# Allegro board democ2.brd
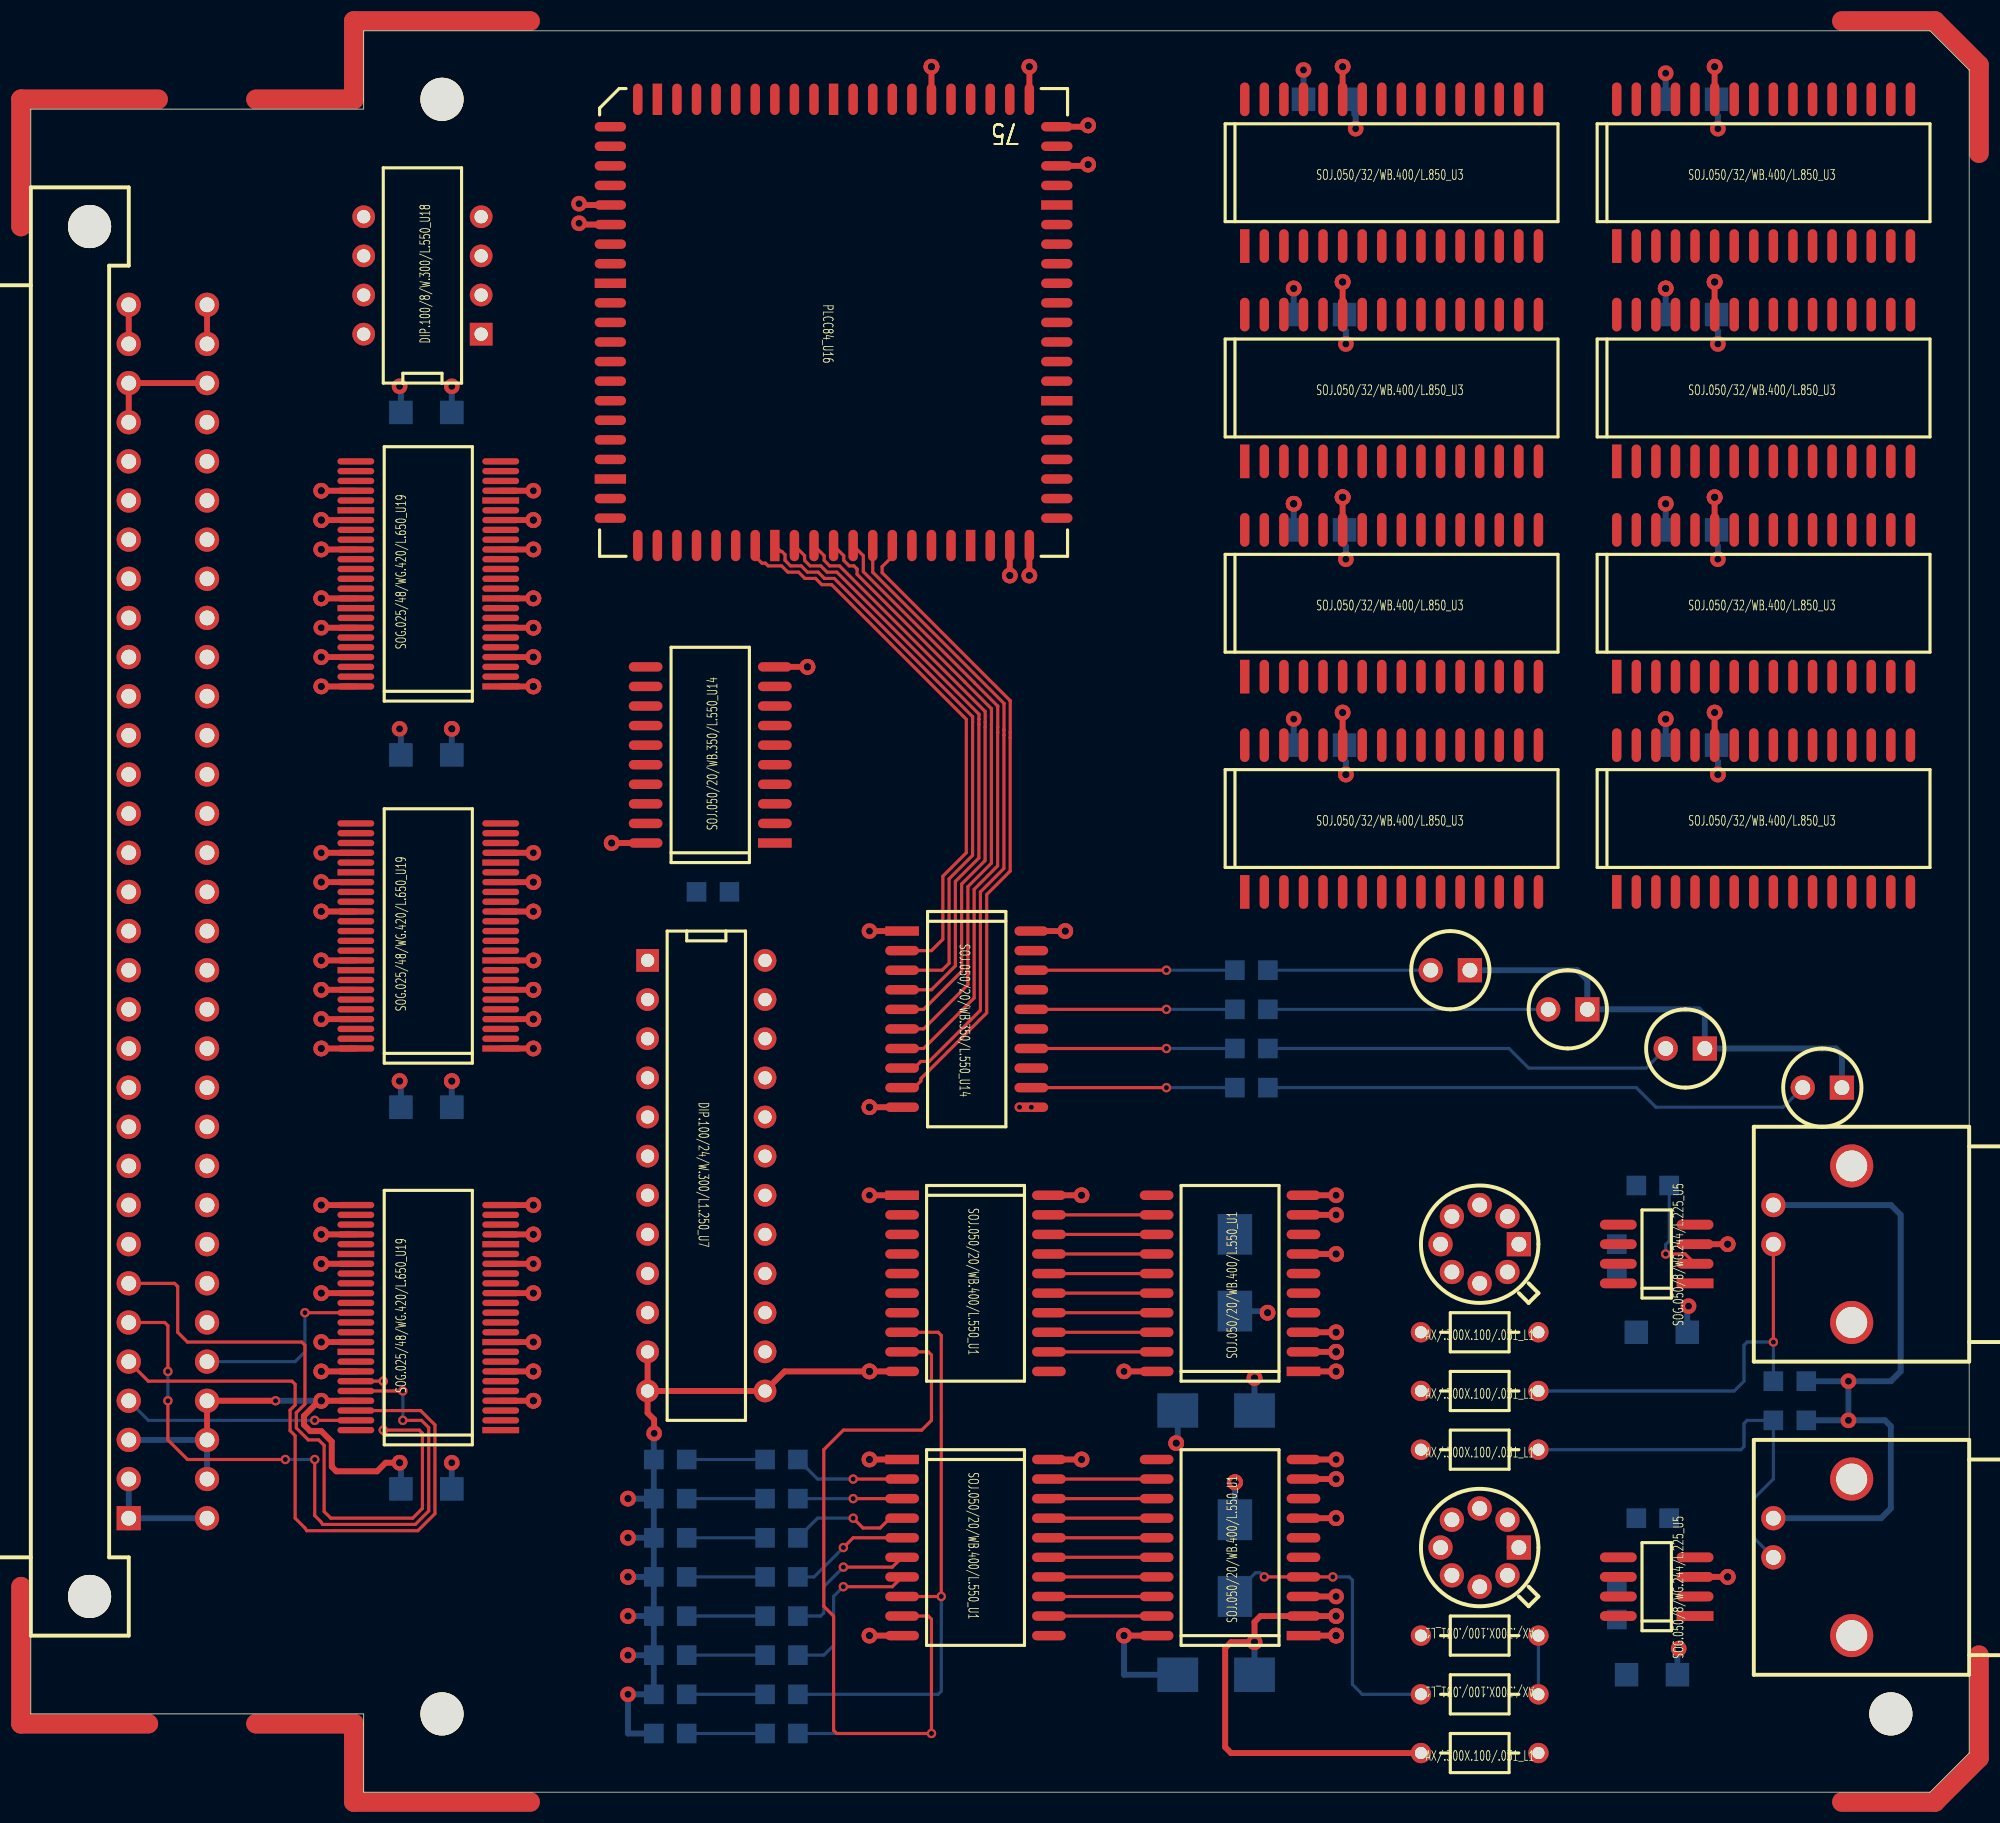
[diagram p0: board, top side]
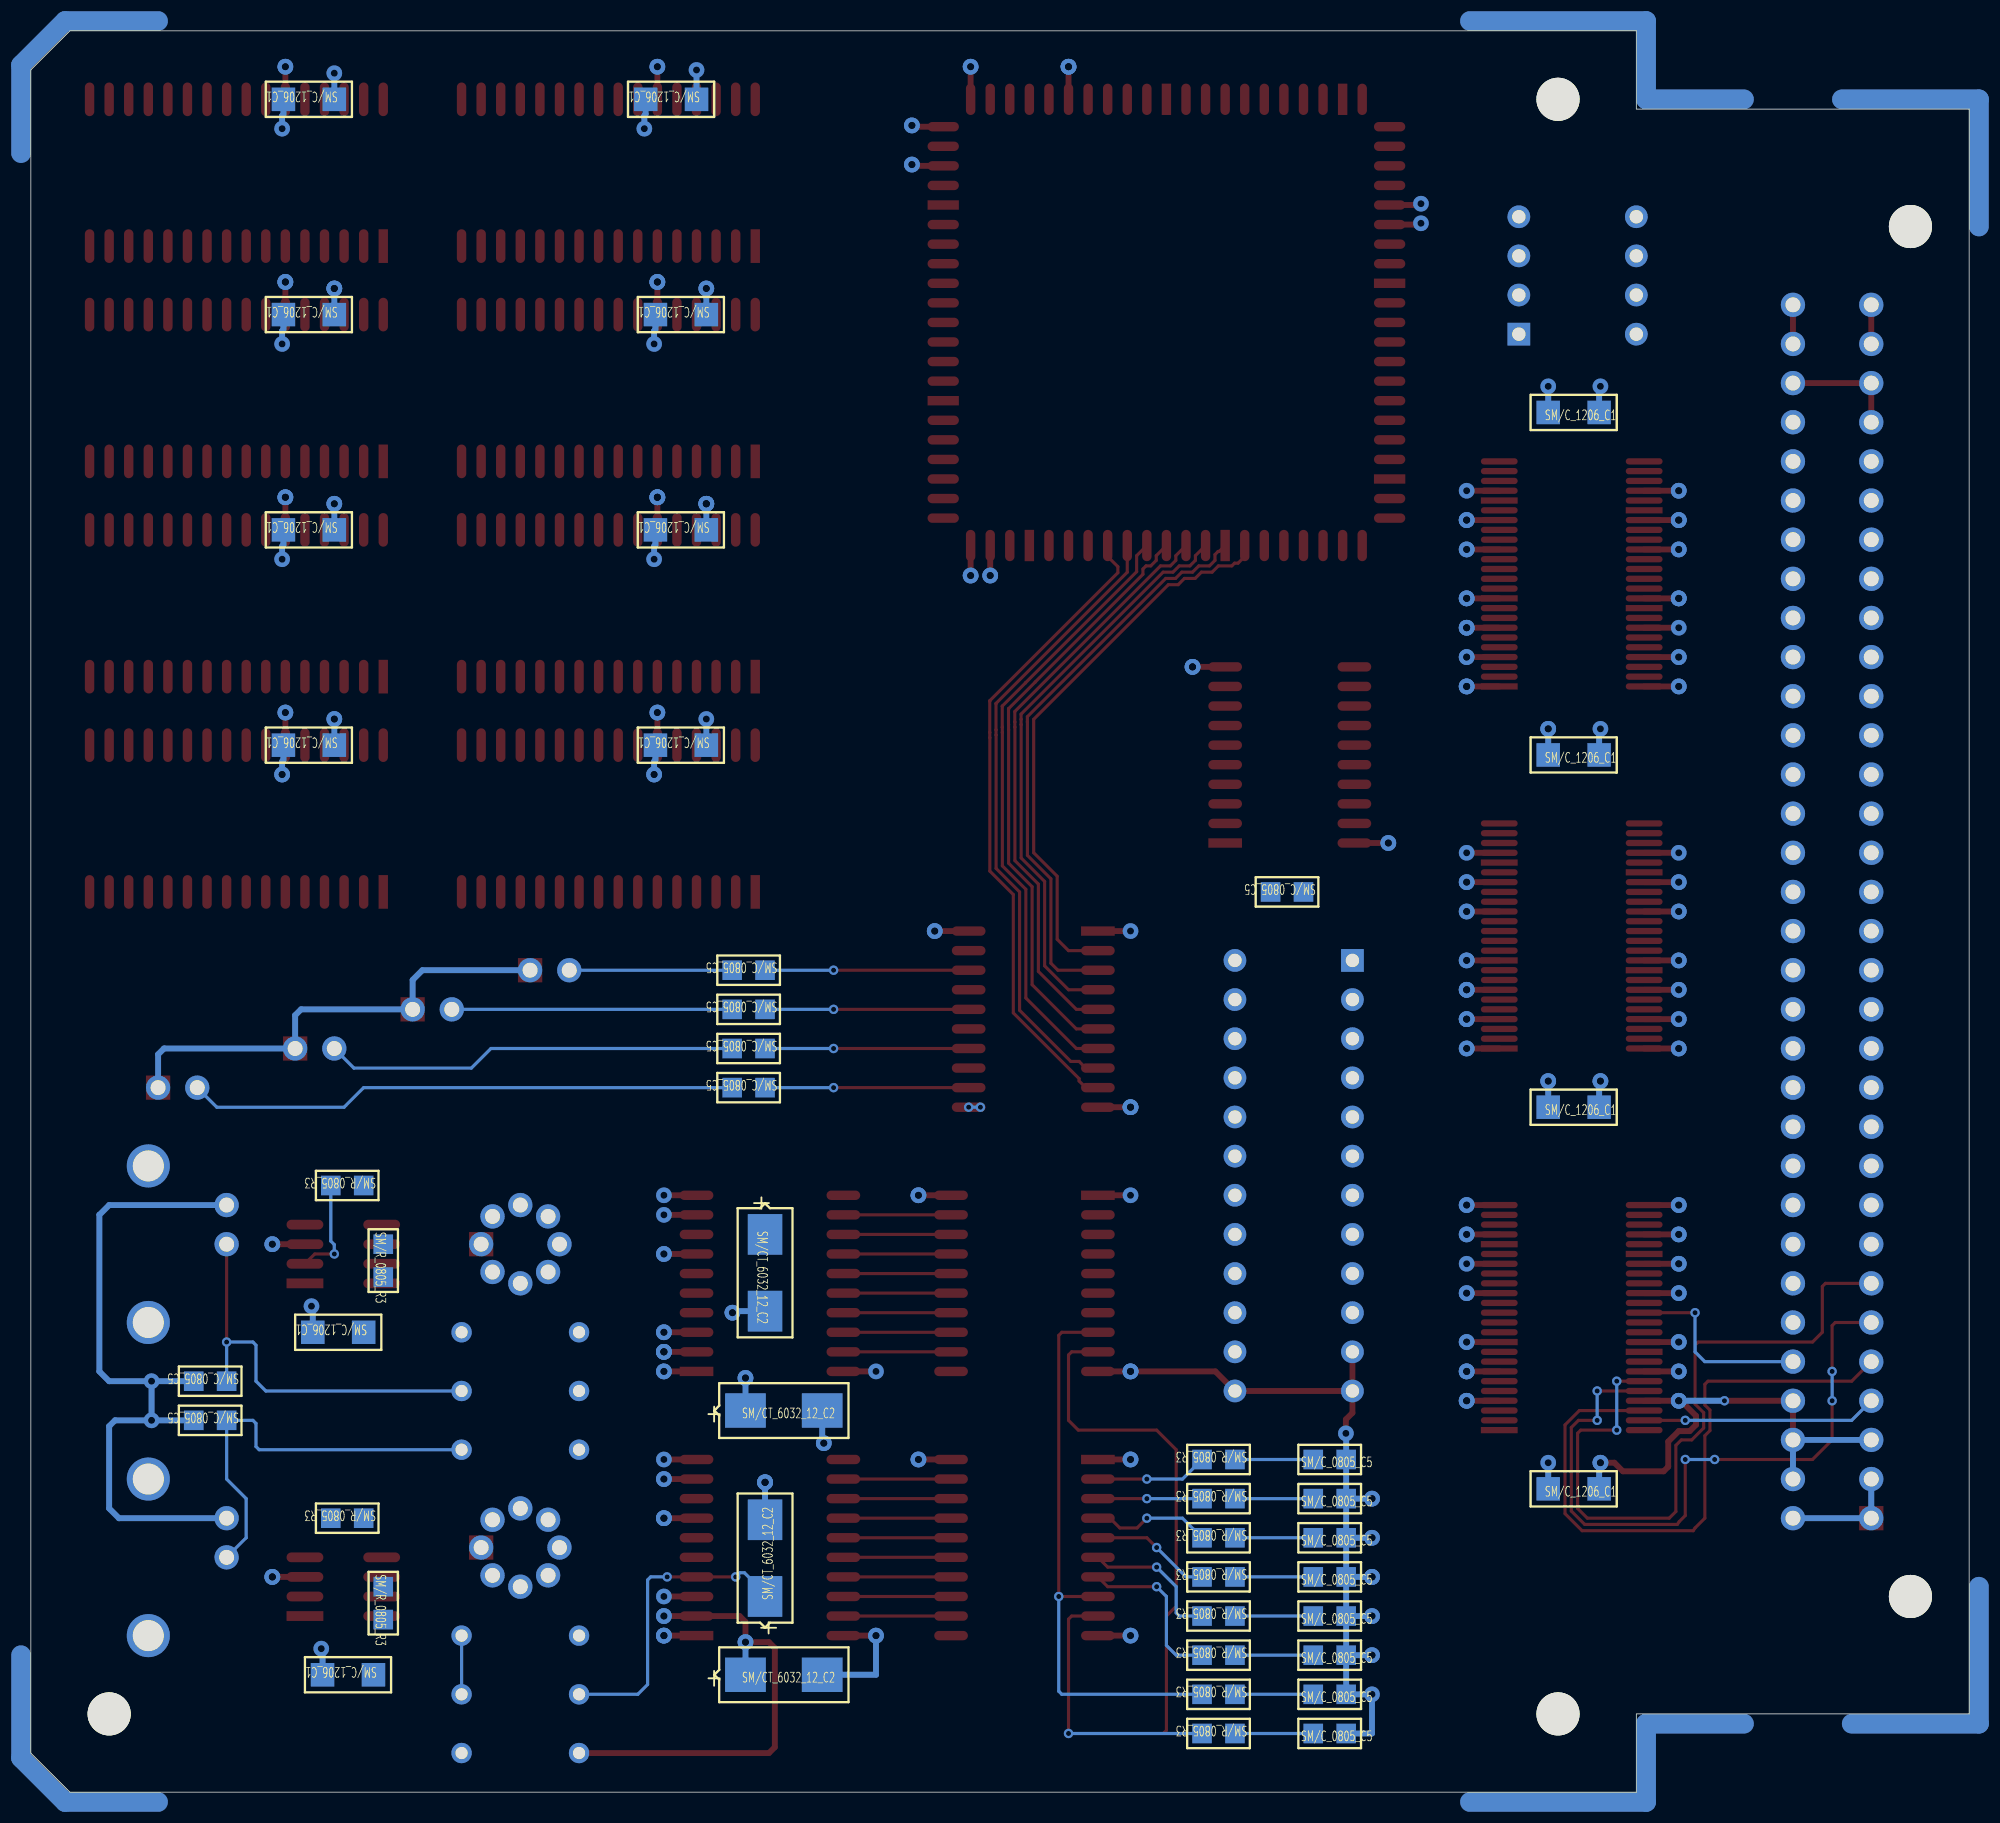
[diagram p1: board, bottom side, seen from below]

Outline 125.73 x 114.3 mm; copper layers: TOP, GND, POWER, BOTTOM. Coordinates in mm from the lower left corner of the outline.
Outline path: 0,109.22 21.59,109.22 21.59,114.3 123.19,114.3 125.73,111.76 125.73,2.54 123.19,0 21.59,0 21.59,5.08 0,5.08 0,109.22

## Design rules (mm)
nets with their own width: min track width 0.203; nets A0 A1 A2 A3 A4 A5 A6 A7 A8 A9 A10 A11 A12 A13 A14 A15 A16 A17 A18 A19 A20 A21 A22 A23 AEN/ BA0 BA1 BA2 BA3 BD0 BD1 BD2 BD3 BD4 BD5 BD6 BD7 BD8 BD9 BD10 BD11 BD12 BD13 BD14 BD15 BRD/ BRESET BWR/ D0 D1 D2 D3 D4 D5 D6 D7 D9 D10 D11 D12 D13 D14 D15 DDIR DEN/ DHEN/ FPGA/ GAIN HS/ MCLK MRD/ MWR/ N00036 N00036_6360 N00038 N00038_6372 N00044 N00044_6366 N00046 N00046_6362 N00048 N00048_6359 N00060 N00060_6368 N00306 N00318 N00322 N00671 N00689 N00703 N00717 N00827 N00831 N00835 N00837 N04966 N05690 N05692 N05694 N05696 N05698 N05700 N05702 N05704 N11940 N11950 N11984 N11994 N12004 N19706 N19710 N19714 N19718 N19934 N19938 N19942 N23417 N23878 N24816 N24821 N24826 N84247 N103899 N255822 N314771 N315146 N315333 N320476 N336036 N336041 OUTA OUTC RA0 RA1 RA2 RA3 RA4 RA5 RA6 RA7 RA8 RA9 RA10 RA11 RA12 RA13 RA14 RA15 RD0 RD1 RD2 RD3 RD4 RD5 RD6 RD7 RDY/ RESET/ SEL VCLKA VCLKC VD0 VD1 VD2 VD3 VD4 VD5 VD6 VD7 WAIT/ WSTAT/
nets with their own width: min track width 0.381; nets AGND GND GND_EARTH V12N V+12 VCC

## Placement (name value [footprint] x y rotation side)
C1  .1UF  [SMC1206]  104.14 29.84 0 bottom
C2  .1UF  [SMCT603212]  79.38 24.77 180 bottom
C3  .1UF  [SMCT603212]  79.38 7.62 180 bottom
C4  .1UF  [SMC1206]  106.05 109.86 0 bottom
C5  3300  [SMC0805]  42.55 6.35 180 bottom
C6  .1UF  [SMC1206]  103.51 7.62 0 bottom
C7  3300  [SMC0805]  42.55 21.59 180 bottom
C8  3300  [SMC0805]  42.55 8.89 180 bottom
C9  .1UF  [SMC1206]  27.3 89.53 180 bottom
C10  .1UF  [SMC1206]  27.3 67.31 180 bottom
C11  .1UF  [SMC1206]  27.3 44.45 180 bottom
C12  .1UF  [SMC1206]  106.05 81.91 0 bottom
C13  .1UF  [SMC1206]  106.05 95.89 0 bottom
C14  .1UF  [SMC1206]  106.05 67.95 0 bottom
C15  .1UF  [SMC1206]  27.3 19.69 180 bottom
C16  3300  [SMC0805]  42.55 11.43 180 bottom
C17  3300  [SMC0805]  42.55 13.97 180 bottom
C18  47PF  [SMC0805]  113.03 26.67 0 bottom
C19  3300  [SMC0805]  42.55 3.81 180 bottom
C20  3300  [SMC0805]  42.55 16.51 180 bottom
C21  .1UF  [SMCT603212]  78.11 12.7 90 bottom
C22  .1UF  [SMCT603212]  78.11 36.2 270 bottom
C23  47PF  [SMC0805]  113.03 24.13 0 bottom
C24  3300  [SMC0805]  42.55 19.05 180 bottom
C25  .1UF  [SMC1206]  82.55 109.86 0 bottom
C26  .1UF  [SMC1206]  81.92 95.89 0 bottom
C27  .1UF  [SMC1206]  81.92 81.91 0 bottom
C28  .1UF  [SMC1206]  81.92 67.95 0 bottom
D1  DIODE PHOTO EMIT  [LED]  100.97 50.8 180 top
D2  DIODE PHOTO EMIT  [LED]  93.34 53.34 180 top
D3  DIODE PHOTO EMIT  [LED]  108.59 48.26 180 top
D4  DIODE PHOTO EMIT  [LED]  117.48 45.72 180 top
J1  CON PAD  [DIN64P]  6.35 17.78 90 top
J2  CHANNEL 1  [BNC2P]  113.03 15.24 270 top
J3  CHANNEL 2  [BNC2P]  113.03 35.56 270 top
L1  50  [AX300X100031]  90.17 22.23 0 top
L2  50  [AX300X100031]  90.17 29.84 0 top
L3  50  [AX300X100031]  97.79 6.35 180 top
L4  50  [AX300X100031]  90.17 26.03 0 top
L5  50  [AX300X100031]  97.79 10.16 180 top
L6  50  [AX300X100031]  90.17 2.54 0 top
MTH1  -  [MTHOLE1]  26.67 109.86 0 top
MTH2  -  [MTHOLE1]  26.67 5.08 0 top
MTH3  -  [MTHOLE1]  120.65 5.08 0 top
R1  150  [SMC0805]  78.11 53.34 0 bottom
R2  150  [SMC0805]  78.11 50.8 0 bottom
R3  100  [SMR0805]  104.14 17.78 0 bottom
R4  100  [SMR0805]  102.87 13.34 270 bottom
R5  100  [SMR0805]  102.87 35.56 270 bottom
R6  100  [SMR0805]  104.14 39.37 0 bottom
R7  50  [SMR0805]  47.62 21.59 0 bottom
R8  50  [SMR0805]  47.62 8.89 0 bottom
R9  50  [SMR0805]  47.62 11.43 0 bottom
R10  50  [SMR0805]  47.62 6.35 0 bottom
R11  50  [SMC0805]  43.18 58.42 0 bottom
R12  150  [SMC0805]  78.11 45.72 0 bottom
R13  50  [SMR0805]  47.62 19.05 0 bottom
R14  50  [SMR0805]  47.62 16.51 0 bottom
R15  50  [SMR0805]  47.62 13.97 0 bottom
R16  50  [SMR0805]  47.62 3.81 0 bottom
R17  150  [SMC0805]  78.11 48.26 0 bottom
U1  TLC5602A  [SOJ05020WB400L550]  82.55 10.16 90 top
U2  TLC5602A  [SOJ05020WB400L550]  82.55 27.3 90 top
U3  TC55B4257J  [SOJ05032WB400L850]  102.87 86.36 0 top
U4  TC55B4257J  [SOJ05032WB400L850]  102.87 100.33 0 top
U5  DG419A  [SOG0508WG244L225]  107.95 33.02 90 top
U6  DG419A  [SOG0508WG244L225]  107.95 11.43 90 top
U7  20L10  [DIP10024W300L1250]  40 53.98 270 top
U8  TC55B4257J  [SOJ05032WB400L850]  78.74 72.39 0 top
U9  TC55B4257J  [SOJ05032WB400L850]  78.74 100.33 0 top
U10  TC55B4257J  [SOJ05032WB400L850]  102.87 72.39 0 top
U11  TC55B4257J  [SOJ05032WB400L850]  102.87 58.42 0 top
U12  TC55B4257J  [SOJ05032WB400L850]  78.74 58.42 0 top
U13  TC55B4257J  [SOJ05032WB400L850]  78.74 86.36 0 top
U14  ACT574  [SOJ05020WB350L550]  56.52 55.88 270 top
U15  ACT574  [SOJ05020WB400L550]  56.52 21.59 270 top
U16  EPF8282  [PLCC84]  52.07 109.86 270 top
U17  ACT574  [SOJ05020WB400L550]  56.52 38.73 270 top
U18  EPC1064  [DIP1008W300L550]  29.21 94.61 90 top
U19  FCT16245  [SOG02548WG420L650]  30.48 71.75 90 top
U20  FCT16245  [SOG02548WG420L650]  30.48 23.49 90 top
U21  FCT16245  [SOG02548WG420L650]  30.48 48.26 90 top
U22  TLE2037A  [TO-99]  96.52 35.56 90 top
U23  TLE2037A  [TO-99]  96.52 15.88 90 top
U25  74ACT574  [SOJ05020WB350L550]  48.26 61.59 90 top

## Library data of the parts
C1-C3 C5-C8 C16 C17 C19-C22 C24 = CAP: alternate symbols: (SMCT603212;SMC0805)
C4 C9-C15 C25-C28 = CAP_NP
C18 C23 = CAPACITOR
D1-D4 = DIODE_PHOTO_EMIT
J1 = 64CONSEPPINS
J2 J3 = BNC
L1-L6 = INDUCTOR
MTH1-MTH3 = MTHOLE1
R1-R17 = R: alternate symbols: (SMR0805)
U1 U2 = TLC5602A
U3 U4 U8-U13 = TC56B4257J
U5 U6 = DG419A
U7 = 20L10
U14 U15 U17 = ACT574: alternate symbols: (SOJ05020WB400L550)
U16 = FPGA_0
U18 = EPC1064
U19-U21 = FCT16245
U22 U23 = TLE2037A
U25 = 74ACT574

## Footprints (pads in the part's own frame, mm; a bottom-side part is the same pattern mirrored in y, then rotated)
AX300X100031
  round 1.321 hole 0.787: 1(0,0) 2(7.62,0)
BNC2P
  round 1.575 hole 0.965: 1(0,0) 2(-2.54,0)
  round 2.794 hole 2.007: 3(5.08,5.08) 4(-5.08,5.08)
DIN64P
  rect 1.575x1.575 hole 0.965: 1(0,0)
  round 1.575 hole 0.965: 2(2.54,0) 3(5.08,0) 4(7.62,0) 5(10.16,0) 6(12.7,0) 7(15.24,0) 8(17.78,0) 9(20.32,0) 10(22.86,0) 11(25.4,0) 12(27.94,0) 13(30.48,0) 14(33.02,0) 15(35.56,0) 16(38.1,0) 17(40.64,0) 18(43.18,0) 19(45.72,0) 20(48.26,0) 21(50.8,0) 22(53.34,0) 23(55.88,0) 24(58.42,0) 25(60.96,0) 26(63.5,0) 27(66.04,0) 28(68.58,0) 29(71.12,0) 30(73.66,0) 31(76.2,0) 32(78.74,0) 33(0,-5.08) 34(2.54,-5.08) 35(5.08,-5.08) 36(7.62,-5.08) 37(10.16,-5.08) 38(12.7,-5.08) 39(15.24,-5.08) 40(17.78,-5.08) 41(20.32,-5.08) 42(22.86,-5.08) 43(25.4,-5.08) 44(27.94,-5.08) 45(30.48,-5.08) 46(33.02,-5.08) 47(35.56,-5.08) 48(38.1,-5.08) 49(40.64,-5.08) 50(43.18,-5.08) 51(45.72,-5.08) 52(48.26,-5.08) 53(50.8,-5.08) 54(53.34,-5.08) 55(55.88,-5.08) 56(58.42,-5.08) 57(60.96,-5.08) 58(63.5,-5.08) 59(66.04,-5.08) 60(68.58,-5.08) 61(71.12,-5.08) 62(73.66,-5.08) 63(76.2,-5.08) 64(78.74,-5.08)
  round 2.794 hole 2.794: 65(83.82,2.54) 66(-5.08,2.54)
DIP1008W300L550
  rect 1.473x1.473 hole 0.864: 1(0,0)
  round 1.473 hole 0.864: 2(2.54,0) 3(5.08,0) 4(7.62,0) 5(7.62,7.62) 6(5.08,7.62) 7(2.54,7.62) 8(0,7.62)
DIP10024W300L1250
  rect 1.473x1.473 hole 0.864: 1(0,0)
  round 1.473 hole 0.864: 2(2.54,0) 3(5.08,0) 4(7.62,0) 5(10.16,0) 6(12.7,0) 7(15.24,0) 8(17.78,0) 9(20.32,0) 10(22.86,0) 11(25.4,0) 12(27.94,0) 13(27.94,7.62) 14(25.4,7.62) 15(22.86,7.62) 16(20.32,7.62) 17(17.78,7.62) 18(15.24,7.62) 19(12.7,7.62) 20(10.16,7.62) 21(7.62,7.62) 22(5.08,7.62) 23(2.54,7.62) 24(0,7.62)
LED
  rect 1.575x1.575 hole 0.965: 1(0,0)
  round 1.575 hole 0.965: 2(2.54,0)
MTHOLE1
  round 2.794 hole 2.794: 1(0,0)
PLCC84
  rect 2.032x0.61 smd: 1(0,0) 10(0,-11.43) 40(28.956,-3.81) 50(28.956,8.89)
  oval 2.032x0.61 smd: 2(0,-1.27) 3(0,-2.54) 4(0,-3.81) 5(0,-5.08) 6(0,-6.35) 7(0,-7.62) 8(0,-8.89) 9(0,-10.16) 11(0,-12.7) 33(28.956,-12.7) 34(28.956,-11.43) 35(28.956,-10.16) 36(28.956,-8.89) 37(28.956,-7.62) 38(28.956,-6.35) 39(28.956,-5.08) 41(28.956,-2.54) 42(28.956,-1.27) 43(28.956,0) 44(28.956,1.27) 45(28.956,2.54) 46(28.956,3.81) 47(28.956,5.08) 48(28.956,6.35) 49(28.956,7.62) 51(28.956,10.16) 52(28.956,11.43) 53(28.956,12.7) 75(0,12.7) 76(0,11.43) 77(0,10.16) 78(0,8.89) 79(0,7.62) 80(0,6.35) 81(0,5.08) 82(0,3.81) 83(0,2.54) 84(0,1.27)
  oval 0.61x2.032 smd: 12(1.778,-14.478) 13(3.048,-14.478) 14(4.318,-14.478) 15(5.588,-14.478) 16(6.858,-14.478) 17(8.128,-14.478) 18(9.398,-14.478) 19(10.668,-14.478) 21(13.208,-14.478) 22(14.478,-14.478) 23(15.748,-14.478) 24(17.018,-14.478) 25(18.288,-14.478) 26(19.558,-14.478) 27(20.828,-14.478) 28(22.098,-14.478) 29(23.368,-14.478) 31(25.908,-14.478) 32(27.178,-14.478) 54(27.178,14.478) 55(25.908,14.478) 56(24.638,14.478) 57(23.368,14.478) 58(22.098,14.478) 59(20.828,14.478) 61(18.288,14.478) 62(17.018,14.478) 63(15.748,14.478) 64(14.478,14.478) 65(13.208,14.478) 66(11.938,14.478) 67(10.668,14.478) 68(9.398,14.478) 69(8.128,14.478) 71(5.588,14.478) 72(4.318,14.478) 73(3.048,14.478) 74(1.778,14.478)
  rect 0.61x2.032 smd: 20(11.938,-14.478) 30(24.638,-14.478) 60(19.558,14.478) 70(6.858,14.478)
SMC0805
  rect 1.27x1.27 smd: 1(0,0) 2(2.134,0)
SMC1206
  rect 1.524x1.524 smd: 1(0,0) 2(3.302,0)
SMCT603212
  rect 2.642x2.235 smd: 1(0,0) 2(4.978,0)
SMR0805
  rect 1.27x1.27 smd: 1(0,0) 2(2.134,0)
SOG0508WG244L225
  rect 0.635x2.388 smd: 1(0,0)
  oval 0.635x2.388 smd: 2(1.27,0) 3(2.54,0) 4(3.81,0) 5(3.81,4.978) 6(2.54,4.978) 7(1.27,4.978) 8(0,4.978)
SOG02548WG420L650
  rect 0.406x2.388 smd: 1(0,0) 10(5.715,0) 20(12.065,0) 30(11.43,9.398) 40(5.08,9.398)
  oval 0.406x2.388 smd: 2(0.635,0) 3(1.27,0) 4(1.905,0) 5(2.54,0) 6(3.175,0) 7(3.81,0) 8(4.445,0) 9(5.08,0) 11(6.35,0) 12(6.985,0) 13(7.62,0) 14(8.255,0) 15(8.89,0) 16(9.525,0) 17(10.16,0) 18(10.795,0) 19(11.43,0) 21(12.7,0) 22(13.335,0) 23(13.97,0) 24(14.605,0) 25(14.605,9.398) 26(13.97,9.398) 27(13.335,9.398) 28(12.7,9.398) 29(12.065,9.398) 31(10.795,9.398) 32(10.16,9.398) 33(9.525,9.398) 34(8.89,9.398) 35(8.255,9.398) 36(7.62,9.398) 37(6.985,9.398) 38(6.35,9.398) 39(5.715,9.398) 41(4.445,9.398) 42(3.81,9.398) 43(3.175,9.398) 44(2.54,9.398) 45(1.905,9.398) 46(1.27,9.398) 47(0.635,9.398) 48(0,9.398)
SOJ05020WB350L550
  rect 0.61x2.184 smd: 1(0,0)
  oval 0.61x2.184 smd: 2(1.27,0) 3(2.54,0) 4(3.81,0) 5(5.08,0) 6(6.35,0) 7(7.62,0) 8(8.89,0) 9(10.16,0) 10(11.43,0) 11(11.43,8.382) 12(10.16,8.382) 13(8.89,8.382) 14(7.62,8.382) 15(6.35,8.382) 16(5.08,8.382) 17(3.81,8.382) 18(2.54,8.382) 19(1.27,8.382) 20(0,8.382)
SOJ05020WB400L550
  rect 0.61x2.184 smd: 1(0,0)
  oval 0.61x2.184 smd: 2(1.27,0) 3(2.54,0) 4(3.81,0) 5(5.08,0) 6(6.35,0) 7(7.62,0) 8(8.89,0) 9(10.16,0) 10(11.43,0) 11(11.43,9.525) 12(10.16,9.525) 13(8.89,9.525) 14(7.62,9.525) 15(6.35,9.525) 16(5.08,9.525) 17(3.81,9.525) 18(2.54,9.525) 19(1.27,9.525) 20(0,9.525)
SOJ05032WB400L850
  rect 0.61x2.184 smd: 1(0,0)
  oval 0.61x2.184 smd: 2(1.27,0) 3(2.54,0) 4(3.81,0) 5(5.08,0) 6(6.35,0) 7(7.62,0) 8(8.89,0) 9(10.16,0) 10(11.43,0) 11(12.7,0) 12(13.97,0) 13(15.24,0) 14(16.51,0) 15(17.78,0) 16(19.05,0) 17(19.05,9.525) 18(17.78,9.525) 19(16.51,9.525) 20(15.24,9.525) 21(13.97,9.525) 22(12.7,9.525) 23(11.43,9.525) 24(10.16,9.525) 25(8.89,9.525) 26(7.62,9.525) 27(6.35,9.525) 28(5.08,9.525) 29(3.81,9.525) 30(2.54,9.525) 31(1.27,9.525) 32(0,9.525)
TO-99
  rect 1.575x1.575 hole 0.965: 1(0,0)
  round 1.575 hole 0.965: 2(1.803,0.737) 3(2.54,2.54) 4(1.803,4.343) 5(0,5.08) 6(-1.803,4.343) 7(-2.54,2.54) 8(-1.803,0.737)

## Nets
AGND: C1.2(TP-2) C6.2(TP-2) C21.2(TP-2) C22.2(TP-2) J1.1(TP-1) J1.2(TP-2) J1.33(TP-33) U1.3(TP-3) U1.7(TP-7) U1.10(TP-10) U2.3(TP-3) U2.7(TP-7) U2.10(TP-10) U5.3(TP-3) U6.3(TP-3)
GND: C2.2(TP-2) C3.2(TP-2) C4.2(TP-2) C5.2(TP-2) C7.2(TP-2) C8.2(TP-2) C9.2(TP-2) C10.2(TP-2) C11.2(TP-2) C12.2(TP-2) C13.2(TP-2) C14.2(TP-2) C15.2(TP-2) C16.2(TP-2) C17.2(TP-2) C19.2(TP-2) C20.2(TP-2) C24.2(TP-2) C25.2(TP-2) C26.2(TP-2) C27.2(TP-2) C28.2(TP-2) J1.3(TP-3) J1.34(TP-34) J1.35(TP-35) J1.36(TP-36) U1.1(TP-1) U1.20(TP-20) U2.1(TP-1) U2.20(TP-20) U3.27(TP-27) U4.27(TP-27) U7.11(TP-11) U7.12(TP-12) U7.13(TP-13) U8.27(TP-27) U9.27(TP-27) U10.27(TP-27) U11.27(TP-27) U12.27(TP-27) U13.27(TP-27) U14.1(TP-1) U14.10(TP-10) U15.1(TP-1) U15.10(TP-10) U16.17(TP-17) U16.53(TP-53) U16.74(TP-74) U16.75(TP-75) U17.1(TP-1) U17.10(TP-10) U19.1(TP-1) U19.4(TP-4) U19.10(TP-10) U19.15(TP-15) U19.21(TP-21) U19.28(TP-28) U19.34(TP-34) U19.39(TP-39) U19.45(TP-45) U19.48(TP-48) U20.4(TP-4) U20.10(TP-10) U20.15(TP-15) U20.21(TP-21) U20.24(TP-24) U20.25(TP-25) U20.28(TP-28) U20.34(TP-34) U20.39(TP-39) U20.45(TP-45) U21.1(TP-1) U21.4(TP-4) U21.10(TP-10) U21.15(TP-15) U21.21(TP-21) U21.28(TP-28) U21.34(TP-34) U21.39(TP-39) U21.45(TP-45) U21.48(TP-48) U25.10(TP-10)
GND_EARTH: C18.2(TP-2) C23.2(TP-2) J2.2(TP-2) J3.2(TP-2)
V12N: J1.31(TP-31) J1.32(TP-32) U5.7(TP-7) U6.7(TP-7) U22.4(TP-4) U23.4(TP-4)
VCC: C2.1(TP-1) C3.1(TP-1) C4.1(TP-1) C9.1(TP-1) C10.1(TP-1) C11.1(TP-1) C12.1(TP-1) C13.1(TP-1) C14.1(TP-1) C15.1(TP-1) C25.1(TP-1) C26.1(TP-1) C27.1(TP-1) C28.1(TP-1) D1.1(TP-1) D2.1(TP-1) D3.1(TP-1) D4.1(TP-1) J1.29(TP-29) J1.30(TP-30) J1.62(TP-62) L2.1(TP-1) L6.1(TP-1) U1.2(TP-2) U1.9(TP-9) U2.2(TP-2) U2.9(TP-9) U7.24(TP-24) U14.20(TP-20) U15.20(TP-20) U16.16(TP-16) U16.52(TP-52) U16.72(TP-72) U16.80(TP-80) U17.20(TP-20) U19.7(TP-7) U19.18(TP-18) U19.31(TP-31) U19.42(TP-42) U20.7(TP-7) U20.18(TP-18) U20.31(TP-31) U20.42(TP-42) U21.7(TP-7) U21.18(TP-18) U21.31(TP-31) U21.42(TP-42) U25.20(TP-20)
A0: J1.54(TP-54) U19.47(TP-47)
A1: J1.55(TP-55) U19.46(TP-46)
A2: J1.56(TP-56) U19.44(TP-44)
A3: J1.57(TP-57) U19.43(TP-43)
A4: J1.58(TP-58) U19.41(TP-41)
A5: J1.59(TP-59) U19.40(TP-40)
A6: J1.60(TP-60) U19.38(TP-38)
A7: J1.61(TP-61) U19.37(TP-37)
A8: J1.13(TP-13) U21.47(TP-47)
A9: J1.14(TP-14) U21.46(TP-46)
A10: J1.15(TP-15) U21.44(TP-44)
A11: J1.16(TP-16) U21.43(TP-43)
A12: J1.17(TP-17) U21.41(TP-41)
A13: J1.18(TP-18) U21.40(TP-40)
A14: J1.19(TP-19) U21.38(TP-38)
A15: J1.20(TP-20) U21.37(TP-37)
A16: J1.37(TP-37) U20.36(TP-36)
A17: J1.38(TP-38) U20.35(TP-35)
A18: J1.39(TP-39) U7.6(TP-6) U20.33(TP-33)
A19: J1.40(TP-40) U7.5(TP-5) U20.32(TP-32)
A20: J1.41(TP-41) U7.4(TP-4) U20.30(TP-30)
A21: J1.42(TP-42) U7.3(TP-3) U20.29(TP-29)
A22: J1.43(TP-43) U7.2(TP-2) U20.27(TP-27)
A23: J1.44(TP-44) U7.1(TP-1) U20.26(TP-26)
AEN/: J1.47(TP-47) U7.8(TP-8)
BA0: U16.6(TP-6) U19.2(TP-2) U20.13(TP-13) U21.2(TP-2)
BA1: U16.7(TP-7) U19.3(TP-3) U20.14(TP-14) U21.3(TP-3)
BA2: U16.8(TP-8) U19.5(TP-5) U20.16(TP-16) U21.5(TP-5)
BA3: U16.9(TP-9) U19.6(TP-6) U20.17(TP-17) U21.6(TP-6)
BD0: U16.25(TP-25) U19.13(TP-13)
BD1: U16.24(TP-24) U19.14(TP-14)
BD2: U16.23(TP-23) U19.16(TP-16)
BD3: U16.22(TP-22) U19.17(TP-17)
BD4: U16.21(TP-21) U19.19(TP-19)
BD5: U16.20(TP-20) U19.20(TP-20)
BD6: U16.19(TP-19) U19.22(TP-22)
BD7: U16.18(TP-18) U19.23(TP-23)
BD8: U20.2(TP-2) U21.23(TP-23)
BD9: U20.3(TP-3) U21.22(TP-22)
BD10: U20.5(TP-5) U21.20(TP-20)
BD11: U20.6(TP-6) U21.19(TP-19)
BD12: U20.8(TP-8) U21.17(TP-17)
BD13: U20.9(TP-9) U21.16(TP-16)
BD14: U20.11(TP-11) U21.14(TP-14)
BD15: U20.12(TP-12) U21.13(TP-13)
BRD/: U7.15(TP-15) U16.73(TP-73)
BRESET: U7.14(TP-14) U16.12(TP-12)
BWR/: U7.16(TP-16) U16.54(TP-54)
D0: J1.28(TP-28) U19.26(TP-26) U21.26(TP-26)
D1: J1.27(TP-27) U19.27(TP-27) U21.27(TP-27)
D2: J1.26(TP-26) U19.29(TP-29) U21.29(TP-29)
D3: J1.25(TP-25) U19.30(TP-30) U21.30(TP-30)
D4: J1.24(TP-24) U19.32(TP-32) U21.32(TP-32)
D5: J1.23(TP-23) U19.33(TP-33) U21.33(TP-33)
D6: J1.4(TP-4) J1.22(TP-22) U19.35(TP-35) U20.47(TP-47) U21.35(TP-35)
D7: J1.21(TP-21) U19.36(TP-36) U21.36(TP-36)
D9: J1.5(TP-5) U20.46(TP-46)
D10: J1.6(TP-6) U20.44(TP-44)
D11: J1.7(TP-7) U20.43(TP-43)
D12: J1.8(TP-8) U20.41(TP-41)
D13: J1.9(TP-9) U20.40(TP-40)
D14: J1.10(TP-10) U20.38(TP-38)
D15: J1.11(TP-11) U20.37(TP-37)
DDIR: U7.19(TP-19) U19.24(TP-24) U20.1(TP-1) U21.24(TP-24)
DEN/: U7.20(TP-20) U19.25(TP-25) U20.48(TP-48)
DHEN/: U7.21(TP-21) U21.25(TP-25)
FPGA/: U7.17(TP-17) U16.30(TP-30)
GAIN: U5.6(TP-6) U6.6(TP-6) U16.28(TP-28)
HS/: U7.18(TP-18) U16.29(TP-29)
MCLK: J1.52(TP-52) U16.31(TP-31)
MRD/: J1.46(TP-46) U7.9(TP-9)
MWR/: J1.45(TP-45) U7.10(TP-10)
N00036_6360: L6.2(TP-2) R3.1(TP-1) R4.1(TP-1) U1.5(TP-5) U1.8(TP-8) U6.5(TP-5)
N00038_6372: C21.1(TP-1) L3.2(TP-2) U1.4(TP-4)
N00044_6366: U6.1(TP-1) U23.2(TP-2)
N00046_6362: R4.2(TP-2) U6.8(TP-8)
N00048_6359: R3.2(TP-2) U6.2(TP-2)
N00060_6368: U1.6(TP-6) U23.3(TP-3)
OUTA: L1.1(TP-1) U23.6(TP-6)
OUTC: L4.1(TP-1) U22.6(TP-6)
RA0: U3.5(TP-5) U4.5(TP-5) U8.5(TP-5) U9.5(TP-5) U10.5(TP-5) U11.5(TP-5) U12.5(TP-5) U13.5(TP-5) U16.58(TP-58)
RA1: U3.4(TP-4) U4.4(TP-4) U8.4(TP-4) U9.4(TP-4) U10.4(TP-4) U11.4(TP-4) U12.4(TP-4) U13.4(TP-4) U16.60(TP-60)
RA2: U3.3(TP-3) U4.3(TP-3) U8.3(TP-3) U9.3(TP-3) U10.3(TP-3) U11.3(TP-3) U12.3(TP-3) U13.3(TP-3) U16.61(TP-61)
RA3: U3.2(TP-2) U4.2(TP-2) U8.2(TP-2) U9.2(TP-2) U10.2(TP-2) U11.2(TP-2) U12.2(TP-2) U13.2(TP-2) U16.62(TP-62)
RA4: U3.32(TP-32) U4.32(TP-32) U8.32(TP-32) U9.32(TP-32) U10.32(TP-32) U11.32(TP-32) U12.32(TP-32) U13.32(TP-32) U16.63(TP-63)
RA5: U3.31(TP-31) U4.31(TP-31) U8.31(TP-31) U9.31(TP-31) U10.31(TP-31) U11.31(TP-31) U12.31(TP-31) U13.31(TP-31) U16.64(TP-64)
RA6: U3.30(TP-30) U4.30(TP-30) U8.30(TP-30) U9.30(TP-30) U10.30(TP-30) U11.30(TP-30) U12.30(TP-30) U13.30(TP-30) U16.65(TP-65)
RA7: U3.29(TP-29) U4.29(TP-29) U8.29(TP-29) U9.29(TP-29) U10.29(TP-29) U11.29(TP-29) U12.29(TP-29) U13.29(TP-29) U16.66(TP-66)
RA8: U3.28(TP-28) U4.28(TP-28) U8.28(TP-28) U9.28(TP-28) U10.28(TP-28) U11.28(TP-28) U12.28(TP-28) U13.28(TP-28) U16.67(TP-67)
RA9: U3.22(TP-22) U4.22(TP-22) U8.22(TP-22) U9.22(TP-22) U10.22(TP-22) U11.22(TP-22) U12.22(TP-22) U13.22(TP-22) U16.69(TP-69)
RA10: U3.21(TP-21) U4.21(TP-21) U8.21(TP-21) U9.21(TP-21) U10.21(TP-21) U11.21(TP-21) U12.21(TP-21) U13.21(TP-21) U16.70(TP-70)
RA11: U3.20(TP-20) U4.20(TP-20) U8.20(TP-20) U9.20(TP-20) U10.20(TP-20) U11.20(TP-20) U12.20(TP-20) U13.20(TP-20) U16.71(TP-71)
RA12: U3.19(TP-19) U4.19(TP-19) U8.19(TP-19) U9.19(TP-19) U10.19(TP-19) U11.19(TP-19) U12.19(TP-19) U13.19(TP-19) U16.76(TP-76)
RA13: U3.18(TP-18) U4.18(TP-18) U8.18(TP-18) U9.18(TP-18) U10.18(TP-18) U11.18(TP-18) U12.18(TP-18) U13.18(TP-18) U16.77(TP-77)
RA14: U3.15(TP-15) U4.15(TP-15) U8.15(TP-15) U9.15(TP-15) U10.15(TP-15) U11.15(TP-15) U12.15(TP-15) U13.15(TP-15) U16.78(TP-78)
RA15: U3.14(TP-14) U4.14(TP-14) U8.14(TP-14) U9.14(TP-14) U10.14(TP-14) U11.14(TP-14) U12.14(TP-14) U13.14(TP-14) U16.79(TP-79)
RD0: U4.26(TP-26) U8.26(TP-26) U9.26(TP-26) U10.26(TP-26) U16.81(TP-81)
RD1: U4.23(TP-23) U8.23(TP-23) U9.23(TP-23) U10.23(TP-23) U16.82(TP-82)
RD2: U4.10(TP-10) U8.10(TP-10) U9.10(TP-10) U10.10(TP-10) U16.83(TP-83)
RD3: U4.7(TP-7) U8.7(TP-7) U9.7(TP-7) U10.7(TP-7) U16.84(TP-84)
RD4: U3.26(TP-26) U11.26(TP-26) U12.26(TP-26) U13.26(TP-26) U16.1(TP-1)
RD5: U3.23(TP-23) U11.23(TP-23) U12.23(TP-23) U13.23(TP-23) U16.2(TP-2)
RD6: U3.10(TP-10) U11.10(TP-10) U12.10(TP-10) U13.10(TP-10) U16.3(TP-3)
RD7: U3.7(TP-7) U11.7(TP-7) U12.7(TP-7) U13.7(TP-7) U16.4(TP-4)
RDY/: J1.50(TP-50) U7.22(TP-22)
RESET/: J1.53(TP-53) U16.15(TP-15)
SEL: U7.23(TP-23) U16.13(TP-13)
V+12: C1.1(TP-1) C6.1(TP-1) J1.63(TP-63) J1.64(TP-64) U5.4(TP-4) U6.4(TP-4) U22.7(TP-7) U23.7(TP-7)
VCLKA: U1.11(TP-11) U2.11(TP-11) U15.11(TP-11) U16.34(TP-34)
VCLKC: R11.2(TP-2) U17.11(TP-11)
VD0: R7.2(TP-2) U14.2(TP-2) U15.2(TP-2) U16.39(TP-39) U17.2(TP-2)
VD1: R13.2(TP-2) U14.3(TP-3) U15.3(TP-3) U16.40(TP-40) U17.3(TP-3)
VD2: R14.2(TP-2) U14.4(TP-4) U15.4(TP-4) U16.41(TP-41) U17.4(TP-4)
VD3: R15.2(TP-2) U14.5(TP-5) U15.5(TP-5) U16.42(TP-42) U17.5(TP-5)
VD4: R9.2(TP-2) U14.6(TP-6) U15.6(TP-6) U16.43(TP-43) U17.6(TP-6)
VD5: R8.2(TP-2) U14.7(TP-7) U15.7(TP-7) U16.44(TP-44) U17.7(TP-7)
VD6: R10.2(TP-2) U14.8(TP-8) U15.8(TP-8) U16.45(TP-45) U17.8(TP-8)
VD7: R16.2(TP-2) U14.9(TP-9) U15.9(TP-9) U16.46(TP-46) U17.9(TP-9)
WAIT/: J1.51(TP-51) U16.33(TP-33)
WSTAT/: U14.11(TP-11) U16.56(TP-56)
N00036: L2.2(TP-2) R5.1(TP-1) R6.1(TP-1) U2.5(TP-5) U2.8(TP-8) U5.5(TP-5)
N00038: C22.1(TP-1) L5.2(TP-2) U2.4(TP-4)
N00044: U5.1(TP-1) U22.2(TP-2)
N00046: R5.2(TP-2) U5.8(TP-8)
N00048: R6.2(TP-2) U5.2(TP-2)
N00060: U2.6(TP-6) U22.3(TP-3)
N00306: U1.12(TP-12) U15.19(TP-19)
N00318: U1.15(TP-15) U15.16(TP-16)
N00322: U1.16(TP-16) U15.15(TP-15)
N00671: C19.1(TP-1) R16.1(TP-1)
N00689: C5.1(TP-1) R10.1(TP-1)
N00703: C8.1(TP-1) R8.1(TP-1)
N00717: C16.1(TP-1) R9.1(TP-1)
N00827: C17.1(TP-1) R15.1(TP-1)
N00831: C20.1(TP-1) R14.1(TP-1)
N00835: C24.1(TP-1) R13.1(TP-1)
N00837: C7.1(TP-1) R7.1(TP-1)
N04966: L3.1(TP-1) L5.1(TP-1)
N05690: U2.12(TP-12) U17.19(TP-19)
N05692: U2.18(TP-18) U17.13(TP-13)
N05694: U2.13(TP-13) U17.18(TP-18)
N05696: U2.19(TP-19) U17.12(TP-12)
N05698: U2.17(TP-17) U17.14(TP-14)
N05700: U2.14(TP-14) U17.17(TP-17)
N05702: U2.15(TP-15) U17.16(TP-16)
N05704: U2.16(TP-16) U17.15(TP-15)
N11940: U1.13(TP-13) U15.18(TP-18)
N11950: U1.14(TP-14) U15.17(TP-17)
N11984: U1.17(TP-17) U15.14(TP-14)
N11994: U1.18(TP-18) U15.13(TP-13)
N12004: U1.19(TP-19) U15.12(TP-12)
N19706: R1.1(TP-1) U14.18(TP-18)
N19710: R2.1(TP-1) U14.16(TP-16)
N19714: R17.1(TP-1) U14.14(TP-14)
N19718: R12.1(TP-1) U14.12(TP-12)
N19934: D4.2(TP-2) R12.2(TP-2)
N19938: D3.2(TP-2) R17.2(TP-2)
N19942: D1.2(TP-2) R2.2(TP-2)
N23417: U10.6(TP-6) U13.6(TP-6) U16.48(TP-48)
N23878: R11.1(TP-1) U16.36(TP-36)
N24816: U16.14(TP-14) U18.1(TP-1)
N24821: U16.10(TP-10) U18.2(TP-2)
N24826: U16.11(TP-11) U18.3(TP-3) U18.4(TP-4)
N84247: U19.9(TP-9) U20.22(TP-22) U21.9(TP-9) U21.12(TP-12)
N103899: U19.8(TP-8) U19.12(TP-12) U20.19(TP-19) U20.23(TP-23) U21.8(TP-8) U21.11(TP-11)
N255822: D2.2(TP-2) R1.2(TP-2)
N314771: U3.6(TP-6) U4.6(TP-6) U16.51(TP-51)
N315146: U9.6(TP-6) U11.6(TP-6) U16.50(TP-50)
N315333: U8.6(TP-6) U12.6(TP-6) U16.49(TP-49)
N320476: U3.11(TP-11) U4.11(TP-11) U8.11(TP-11) U9.11(TP-11) U10.11(TP-11) U11.11(TP-11) U12.11(TP-11) U13.11(TP-11) U16.57(TP-57)
N336036: C23.1(TP-1) J2.1(TP-1) L1.2(TP-2)
N336041: C18.1(TP-1) J3.1(TP-1) L4.2(TP-2)

Pads without a net: J1 12 48 49 65 66; J2 3 4; J3 3 4; MTH1 1; MTH2 1; MTH3 1; U3 1 8 9 12 13 16 17 24 25; U4 1 8 9 12 13 16 17 24 25; U7 7; U8 1 8 9 12 13 16 17 24 25; U9 1 8 9 12 13 16 17 24 25; U10 1 8 9 12 13 16 17 24 25; U11 1 8 9 12 13 16 17 24 25; U12 1 8 9 12 13 16 17 24 25; U13 1 8 9 12 13 16 17 24 25; U14 13 15 17 19; U16 5 26 27 32 35 37 38 47 55 59 68; U18 5 6 7 8; U19 11; U20 20; U22 1 5 8; U23 1 5 8; U25 1 2 3 4 5 6 7 8 9 11 12 13 14 15 16 17 18 19

## Via types
v1: diameter 0.61, hole 0.33, TOP to BOTTOM, 29 vias
v2: diameter 1.016, hole 0.457, TOP to BOTTOM, 248 vias

## Routing (per net, layer and track width the routed paths; a pad name or vN(x,y) marks a point on that pad's centre or on a via; arc(x,y) is an arc through that point)
AGND: length 46
  TOP w0.381: U2.3 v2(84.67,29.84) ; v2(110.07,35.56) U5.3 ; v2(84.67,21.59) U1.10 ; v2(84.67,17.78) U1.7 ; U1.3 v2(84.67,12.7) ; U6.3 v2(110.07,13.97) ; v2(84.67,38.73) U2.10 ; 82.55,34.92 v2(84.67,34.92)
  GND w0.381: J1.33 12.55,17.78 ; J1.33 11.43,18.9 ; J1.33 10.31,17.78 ; J1.33 11.43,16.66 ; J1.2 6.35,21.44 ; J1.2 5.23,20.32 ; J1.2 6.35,19.2 ; J1.2 7.47,20.32 ; J1.1 6.35,18.9 ; J1.1 6.35,16.66 ; J1.1 7.47,17.78 ; J1.1 5.23,17.78
  BOTTOM w0.381: v2(80.22,31.12) 80.12,31.22 C22.2 ; C6.2 106.81,9.23 v2(106.89,9.31) ; C1.2 107.44,31.45 v2(107.53,31.54) ; J1.2 J1.1 J1.33 ; C21.2 v2(78.11,20.11)
GND: length 224.3
  TOP w0.381: v2(35.56,101.81) 35.64,101.73 U16.17 ; v2(40.43,23.28) 40.43,24.19 40,24.61 U7.12 ; U17.10 v2(54.4,27.3) 48.89,27.3 U7.13 U7.12 ; v2(109.22,111.97) U4.27 ; U21.1 v2(32.6,48.26) ; v2(54.4,21.59) U15.1 ; U21.34 v2(18.84,57.15) ; v2(85.09,111.97) U9.27 ; v2(32.6,57.15) U21.15 ; v2(109.22,98) U3.27 ; U14.10 v2(54.4,44.45) ; U20.10 v2(32.6,29.21) ; U20.15 v2(32.6,32.38) ; U13.27 v2(85.09,98) ; v2(68.58,108.16) 68.5,108.08 U16.74 ; U19.28 v2(18.84,84.45) ; U14.1 v2(54.4,55.88) ; U20.21 v2(32.6,36.2) ; U20.25 v2(18.84,38.1) ; J1.35 J1.36 v1(15.88,25.4) ; U19.39 v2(18.84,77.47) ; v2(18.84,71.75) U19.48 ; v2(50.38,73.02) U25.10 ; U21.45 v2(18.84,50.16) ; v2(32.6,50.16) U21.4 ; v2(54.4,38.73) U17.1 ; U20.34 v2(18.84,32.38) ; U12.27 v2(85.09,70.06) ; v2(32.6,53.98) 30.48,53.98 ; v2(84.67,27.3) U2.1 ; U21.28 v2(18.84,60.96) ; U7.12 U7.11 ; v2(32.6,77.47) U19.10 ; U20.39 v2(18.84,29.21) ; U1.1 v2(84.67,10.16) ; v2(32.6,84.45) U19.21 ; U2.20 v2(70.91,27.3) ; U10.27 v2(109.22,84.03) ; v2(109.22,70.06) U11.27 ; v2(64.77,78.95) U16.53 ; 21.08,53.98 v2(18.84,53.98) ; U20.45 v2(18.84,25.4) 18.7,25.4 17.72,24.42 17.72,23.84 18.13,23.43 18.84,23.43 19.52,22.75 19.52,21.13 19.55,21.09 19.82,20.82 22.46,20.82 23.01,21.38 v2(23.92,21.38) ; v2(85.09,84.03) U8.27 ; U19.34 v2(18.84,80.64) ; v2(54.4,10.16) U15.10 ; U20.4 v2(32.6,25.4) ; U21.48 v2(18.84,48.26) ; v2(32.6,60.96) U21.21 ; v2(18.84,73.66) U19.45 ; U16.75 v2(64.77,111.97) ; U19.1 v2(32.6,71.75) ; v2(32.6,80.64) U19.15 ; v2(70.91,10.16) U1.20 ; v2(32.6,73.66) U19.4 ; U20.28 v2(18.84,36.2) ; U20.24 v2(32.6,38.1)
  BOTTOM w0.381: C24.2 C7.2 40.41,23.27 v2(40.43,23.28) ; C24.2 v2(38.73,19.05) ; C24.2 C20.2 ; v2(109.43,107.95) 109.43,108.8 109.35,108.89 C4.2 ; C12.2 109.35,80.95 109.43,80.86 v2(109.43,80.01) ; v1(15.88,25.4) v2(18.84,25.4) ; v2(23.92,46.14) 24,46.06 C11.2 ; C3.2 70.91,7.62 v2(70.91,10.16) ; v2(23.92,21.38) 24,21.29 C15.2 ; v2(38.73,13.97) C17.2 ; C17.2 C16.2 ; C17.2 C20.2 ; v2(74.3,22.65) 74.4,22.75 C2.2 ; C16.2 C8.2 ; C16.2 v2(38.73,11.43) ; C8.2 v2(38.73,8.89) ; C8.2 C5.2 v2(38.73,6.35) 38.73,3.81 C19.2 ; J1.34 J1.35 J1.3 ; v2(85.3,93.98) 85.3,94.83 85.22,94.92 85.22,95.89 ; C14.2 109.35,66.98 109.43,66.89 v2(109.43,66.04) ; C20.2 v2(38.73,16.51) ; v2(85.3,80.01) 85.3,80.86 85.22,80.95 85.22,81.91 ; v2(85.3,66.04) 85.3,66.89 85.22,66.98 85.22,67.95 ; v2(85.94,107.95) 85.94,108.8 85.85,108.89 C25.2 ; C10.2 24,68.92 v2(23.92,69) ; v2(23.92,91.23) 24,91.14 C9.2 ; v2(109.43,93.98) 109.43,94.83 109.35,94.92 C13.2
GND_EARTH: length 46.5
  BOTTOM w0.381: v2(117.9,24.13) 120.27,24.13 120.65,23.75 120.65,18.41 120.02,17.78 J2.2 ; v2(117.9,24.13) v2(117.9,26.67) ; v2(117.9,24.13) C23.2 ; v2(117.9,26.67) 120.65,26.67 121.28,27.3 121.28,37.46 120.65,38.1 J3.2 ; v2(117.9,26.67) C18.2
V12N: length 2.5
  TOP w0.381: J1.32 J1.31
VCC: length 140.8
  TOP w0.381: U14.20 v2(67.1,55.88) ; v2(68.58,105.62) 68.5,105.54 66.55,105.54 ; U19.18 v2(32.6,82.55) ; U17.20 v2(68.16,38.73) ; U16.16 35.64,103 v2(35.56,103.08) ; U20.31 v2(18.84,34.29) ; U2.2 v2(84.67,28.58) ; v2(58.42,111.97) U16.80 ; v2(32.6,34.29) U20.18 ; v2(18.84,27.3) U20.42 ; U15.20 v2(68.16,21.59) ; v2(63.5,78.95) U16.52 ; v2(84.67,11.43) U1.2 79.76,11.43 79.38,11.05 v2(79.38,9.74) 77.85,9.74 77.47,9.35 77.47,2.92 77.85,2.54 L6.1 ; U19.31 v2(18.84,82.55) ; U21.18 v2(32.6,59.05) ; J1.29 J1.30 J1.62 ; v2(18.84,75.56) U19.42 ; U21.31 v2(18.84,59.05) ; v2(84.67,37.46) 82.55,37.46 ; U25.20 v2(37.68,61.59) ; U19.7 v2(32.6,75.56) ; U20.7 v2(32.6,27.3) ; v2(84.67,20.32) U1.9 ; v2(18.84,52.07) U21.42 ; U21.7 v2(32.6,52.07)
  BOTTOM w0.381: C3.1 v2(79.38,9.74) ; v2(106.05,111.55) C4.1 ; D2.1 100.33,53.34 100.97,52.7 D1.1 108.2,50.8 108.59,50.42 D3.1 117.09,48.26 117.48,47.88 D4.1 ; v2(27.3,69) C10.1 ; v2(106.05,83.61) C12.1 ; v2(27.3,46.14) C11.1 ; C26.1 v2(81.92,97.58) ; v2(106.05,97.58) C13.1 ; v2(81.92,83.61) C27.1 ; v2(79.38,26.88) C2.1 ; C28.1 v2(81.92,69.64) ; C14.1 v2(106.05,69.64) ; v2(27.3,21.38) C15.1 ; v2(27.3,91.23) C9.1 ; v2(82.55,111.76) C25.1
A16: length 12.5
  TOP w0.203: v1(17.78,31.12) U20.36
  BOTTOM w0.203: J1.37 17.14,27.94 17.78,28.58 v1(17.78,31.12)
D6: length 15.3
  TOP w0.203: v1(18.41,24.13) U20.47
  BOTTOM w0.203: v1(18.41,24.13) 7.62,24.13 J1.4
D9: length 41.5
  TOP w0.203: U20.46 25.28,24.77 26.22,23.83 26.22,18.08 25.11,16.97 17.9,16.97 17.78,17.14 17.14,17.78 17.14,23.13 16.81,23.46 16.81,24.8 17.14,25.13 17.14,26.47 16.94,26.67 7.62,26.67 J1.5
D10: length 44
  TOP w0.203: v1(24.13,24.13) 25.34,24.13 25.81,23.66 25.81,18.25 24.94,17.37 18.93,17.37 18.81,17.55 18.41,17.95 v1(18.41,21.59) ; v1(8.89,25.4) 8.89,22.86 10.16,21.59 v1(16.51,21.59) ; v1(24.13,26.03) U20.44 ; v1(8.89,27.3) 8.89,30.28 8.69,30.48 J1.6
  BOTTOM w0.203: v1(16.51,21.59) v1(18.41,21.59) ; v1(8.89,27.3) v1(8.89,25.4) ; v1(24.13,24.13) v1(24.13,26.03)
D11: length 46.3
  TOP w0.203: J1.7 9.32,33.02 9.52,32.82 9.52,29.84 10.16,29.21 17.58,29.21 17.78,29.01 17.78,25.18 17.22,24.63 17.22,23.63 18,22.86 18.67,22.86 19.02,22.5 19.02,18.21 19.46,17.78 24.77,17.78 25.4,18.41 25.4,23.29 25.2,23.49 v1(22.86,23.49) ; v1(22.86,26.67) U20.43
  BOTTOM w0.203: v1(22.86,23.49) v1(22.86,26.67)
N00038_6372: length 20.1
  TOP w0.203: v1(84.45,13.97) U1.4 v1(80.01,13.97)
  BOTTOM w0.203: v1(84.45,13.97) 85.52,13.97 85.73,13.77 85.73,6.99 86.36,6.35 L3.2 ; v1(80.01,13.97) 79.74,14.24 79.44,14.24 78.11,12.9 C21.1
V+12: length 2.5
  TOP w0.381: J1.64 J1.63
VD0: length 43.9
  TOP w0.203: v1(53.34,20.32) U15.2 ; U16.39 46.99,80.19 47.42,79.76 47.65,79.76 47.83,79.58 48.7,79.58 49.11,79.17 49.8,79.17 50.21,78.77 50.9,78.77 51.31,78.36 51.94,78.36 60.68,69.62 60.68,60.97 59.16,59.44 59.16,55.35 58.42,54.61 U14.2
  BOTTOM w0.203: R7.2 51.03,20.32 v1(53.34,20.32)
VD1: length 44.3
  TOP w0.203: U16.40 48.64,80.52 48.72,80.52 48.92,80.31 48.92,79.93 49.28,79.58 49.97,79.58 50.38,79.17 51.07,79.17 51.48,78.77 52.11,78.77 61.09,69.79 61.09,69.45 61.09,69.45 61.09,60.79 59.56,59.27 59.56,53.79 59.11,53.34 U14.3 ; v1(53.34,19.05) U15.3
  BOTTOM w0.203: R13.2 v1(53.34,19.05)
VD2: length 45.6
  TOP w0.203: U15.4 55.73,17.78 55.09,17.14 53.97,17.14 v1(53.34,17.78) ; U14.4 58.42,52.07 59.97,53.62 59.97,59.1 61.49,60.62 61.49,69.28 61.5,69.28 61.5,69.62 61.5,69.62 61.5,69.96 52.28,79.17 51.65,79.17 51.24,79.58 50.55,79.58 50.19,79.93 50.19,80.24 U16.41
  BOTTOM w0.203: v1(53.34,17.78) 51.03,17.78 R14.2
VD3: length 45.9
  TOP w0.203: U15.5 53.34,16.51 v1(52.7,15.88) ; U14.5 57.91,50.8 60.38,53.26 60.38,58.93 61.9,60.45 61.9,69.11 61.9,69.11 61.9,69.45 61.9,69.45 61.9,70.13 52.45,79.58 51.82,79.58 51.46,79.93 51.46,80.24 U16.42
  BOTTOM w0.203: R15.2 50.8,13.97 v1(52.7,15.88)
VD4: length 48.3
  TOP w0.203: U14.6 57.91,49.53 60.78,52.4 60.78,58.76 62.31,60.28 62.31,68.94 62.31,68.94 62.31,69.28 62.31,69.28 62.31,70.3 62.31,70.3 62.31,70.31 60.58,72.04 60.58,72.04 53.59,79.03 53.59,79.38 53.39,79.58 53.09,79.58 52.73,79.93 52.73,80.24 U16.43 ; v1(52.7,14.61) 55.88,14.61 U15.6
  BOTTOM w0.203: v1(52.7,14.61) 51.44,13.34 51.44,11.63 51.23,11.43 R9.2
VD5: length 50.6
  TOP w0.203: U14.7 57.91,48.26 61.19,51.54 61.19,58.59 62.71,60.11 62.71,68.77 62.72,68.77 62.72,69.11 62.72,69.11 62.72,70.47 62.71,70.47 62.71,70.48 61.21,71.98 61.21,71.99 54,79.2 54,80.24 U16.44 ; v1(52.7,13.34) 55.88,13.34 U15.7
  BOTTOM w0.203: v1(52.7,13.34) 52.07,12.7 52.07,9.53 51.44,8.89 R8.2
VD6: length 78.6
  TOP w0.203: U17.8 58.85,29.84 59.05,29.64 v1(59.05,12.7) U15.8 ; U14.8 57.3,46.99 57.73,47.42 58.28,47.42 61.59,50.74 61.59,58.42 63.12,59.94 63.12,68.6 63.12,68.6 63.12,68.94 63.12,68.94 63.12,70.64 63.12,70.64 63.12,70.66 54.61,79.17 U16.45
  BOTTOM w0.203: R10.2 58.85,6.35 59.05,6.55 v1(59.05,12.7)
VD7: length 99.2
  TOP w0.203: U14.9 57.3,45.72 57.73,46.15 57.73,46.3 62,50.57 62,58.25 63.53,59.77 63.53,68.43 63.53,68.43 63.53,68.77 63.53,68.77 63.53,70.81 63.53,70.81 63.53,70.83 55.22,79.13 55.22,79.53 55.88,80.19 U16.46 ; U17.9 58.22,28.58 58.42,28.37 58.42,24.13 57.78,23.49 52.7,23.49 51.44,22.23 51.44,12.07 52.07,11.43 52.07,4.01 52.27,3.81 v1(58.42,3.81) 58.42,11.23 58.22,11.43 U15.9
  BOTTOM w0.203: R16.2 v1(58.42,3.81)
WSTAT/: length 0.8
  BOTTOM w0.203: v1(64.9,44.45) v1(64.14,44.45)
N00048: length 6.7
  TOP w0.203: U5.2 107.31,34.92 v1(106.05,34.92)
  BOTTOM w0.203: v1(106.05,34.92) 106.05,35.53 106.27,35.76 R6.2
N00306: length 7
  TOP w0.203: U1.12 U15.19
N00318: length 7
  TOP w0.203: U1.15 U15.16
N00322: length 7
  TOP w0.203: U1.16 U15.15
N00671: length 5.1
  BOTTOM w0.203: C19.1 R16.1
N00689: length 5.1
  BOTTOM w0.203: C5.1 R10.1
N00703: length 5.1
  BOTTOM w0.203: C8.1 R8.1
N00717: length 5.1
  BOTTOM w0.203: C16.1 R9.1
N00827: length 5.1
  BOTTOM w0.203: C17.1 R15.1
N00831: length 5.1
  BOTTOM w0.203: C20.1 R14.1
N00835: length 5.1
  BOTTOM w0.203: C24.1 R13.1
N00837: length 5.1
  BOTTOM w0.203: C7.1 R7.1
N04966: length 3.8
  BOTTOM w0.203: L3.1 L5.1
N05690: length 7
  TOP w0.203: 73.03,37.46 U17.19
N05692: length 7
  TOP w0.203: U2.18 U17.13
N05694: length 7
  TOP w0.203: U2.13 U17.18
N05696: length 7
  TOP w0.203: U2.19 U17.12
N05698: length 7
  TOP w0.203: U2.17 U17.14
N05700: length 7
  TOP w0.203: 73.03,34.92 66.04,34.92
N05702: length 7
  TOP w0.203: U2.15 U17.16
N05704: length 7
  TOP w0.203: U2.16 U17.15
N11940: length 7
  TOP w0.203: U1.13 U15.18
N11950: length 7
  TOP w0.203: U1.14 U15.17
N11984: length 7
  TOP w0.203: U1.17 U15.14
N11994: length 7
  TOP w0.203: U1.18 U15.13
N12004: length 7
  TOP w0.203: U1.19 U15.12
N19706: length 13.2
  TOP w0.203: U14.18 v1(73.66,53.34)
  BOTTOM w0.203: v1(73.66,53.34) R1.1
N19710: length 13.2
  TOP w0.203: U14.16 v1(73.66,50.8)
  BOTTOM w0.203: v1(73.66,50.8) R2.1
N19714: length 13.2
  TOP w0.203: U14.14 v1(73.66,48.26)
  BOTTOM w0.203: v1(73.66,48.26) R17.1
N19718: length 13.2
  TOP w0.203: U14.12 v1(73.66,45.72)
  BOTTOM w0.203: v1(73.66,45.72) R12.1
N19934: length 35.7
  BOTTOM w0.203: D4.2 113.67,44.45 105.41,44.45 104.14,45.72 R12.2
N19938: length 26.9
  BOTTOM w0.203: R17.2 95.89,48.26 97.16,46.99 104.78,46.99 D3.2
N19942: length 18.2
  BOTTOM w0.203: R2.2 D1.2
N255822: length 10.6
  BOTTOM w0.203: R1.2 D2.2
N336036: length 26.8
  BOTTOM w0.203: J2.1 111.76,16.51 111.76,19.05 113.03,20.32 C23.1 111.33,24.13 111.12,23.93 111.12,22.43 110.92,22.23 L1.2
N336041: length 26.8
  TOP w0.203: J3.1 v1(113.03,29.21)
  BOTTOM w0.203: C18.1 v1(113.03,29.21) 111.33,29.21 111.12,29.01 111.12,26.67 110.49,26.03 L4.2

## Copper pours and planes (outline as drawn; the poured copper is in the pictures)
AGND on GND: 0,21.59 8.89,21.59 8.89,19.05 17.78,19.05 25.4,11.43 29.21,11.43 36.2,4.45 50.17,4.45 52.07,6.35 76.84,6.35 76.84,40.64 87,40.64 87,28.58 82.55,28.58 82.55,24.13 87.63,24.13 87.63,11.43 82.55,11.43 82.55,6.35 104.78,6.35 104.78,38.73 111.12,38.73 111.12,0 21.59,0 21.59,5.08 0,5.08
GND on GND: 21.59,5.08 0,5.08 0,109.22 21.59,109.22 21.59,114.3 123.19,114.3 125.73,111.76 125.73,2.54 123.19,0 21.59,0
GND_EARTH on GND: 111.12,0 123.19,0 125.73,2.54 125.73,45.72 111.12,45.72
VCC on POWER: 21.59,5.08 0,5.08 0,109.22 21.59,109.22 21.59,114.3 123.19,114.3 125.73,111.76 125.73,2.54 123.19,0 21.59,0
